# Altium PCB PCB.PcbDoc
Units mil, origin at the board's own origin, x right, y up, seen from the top; angles counter-clockwise.
Board outline 1775 x 2175 mil, 2 copper layers (Top Layer, Bottom Layer); 68 components, 36 nets, 258 pads, 73 vias.
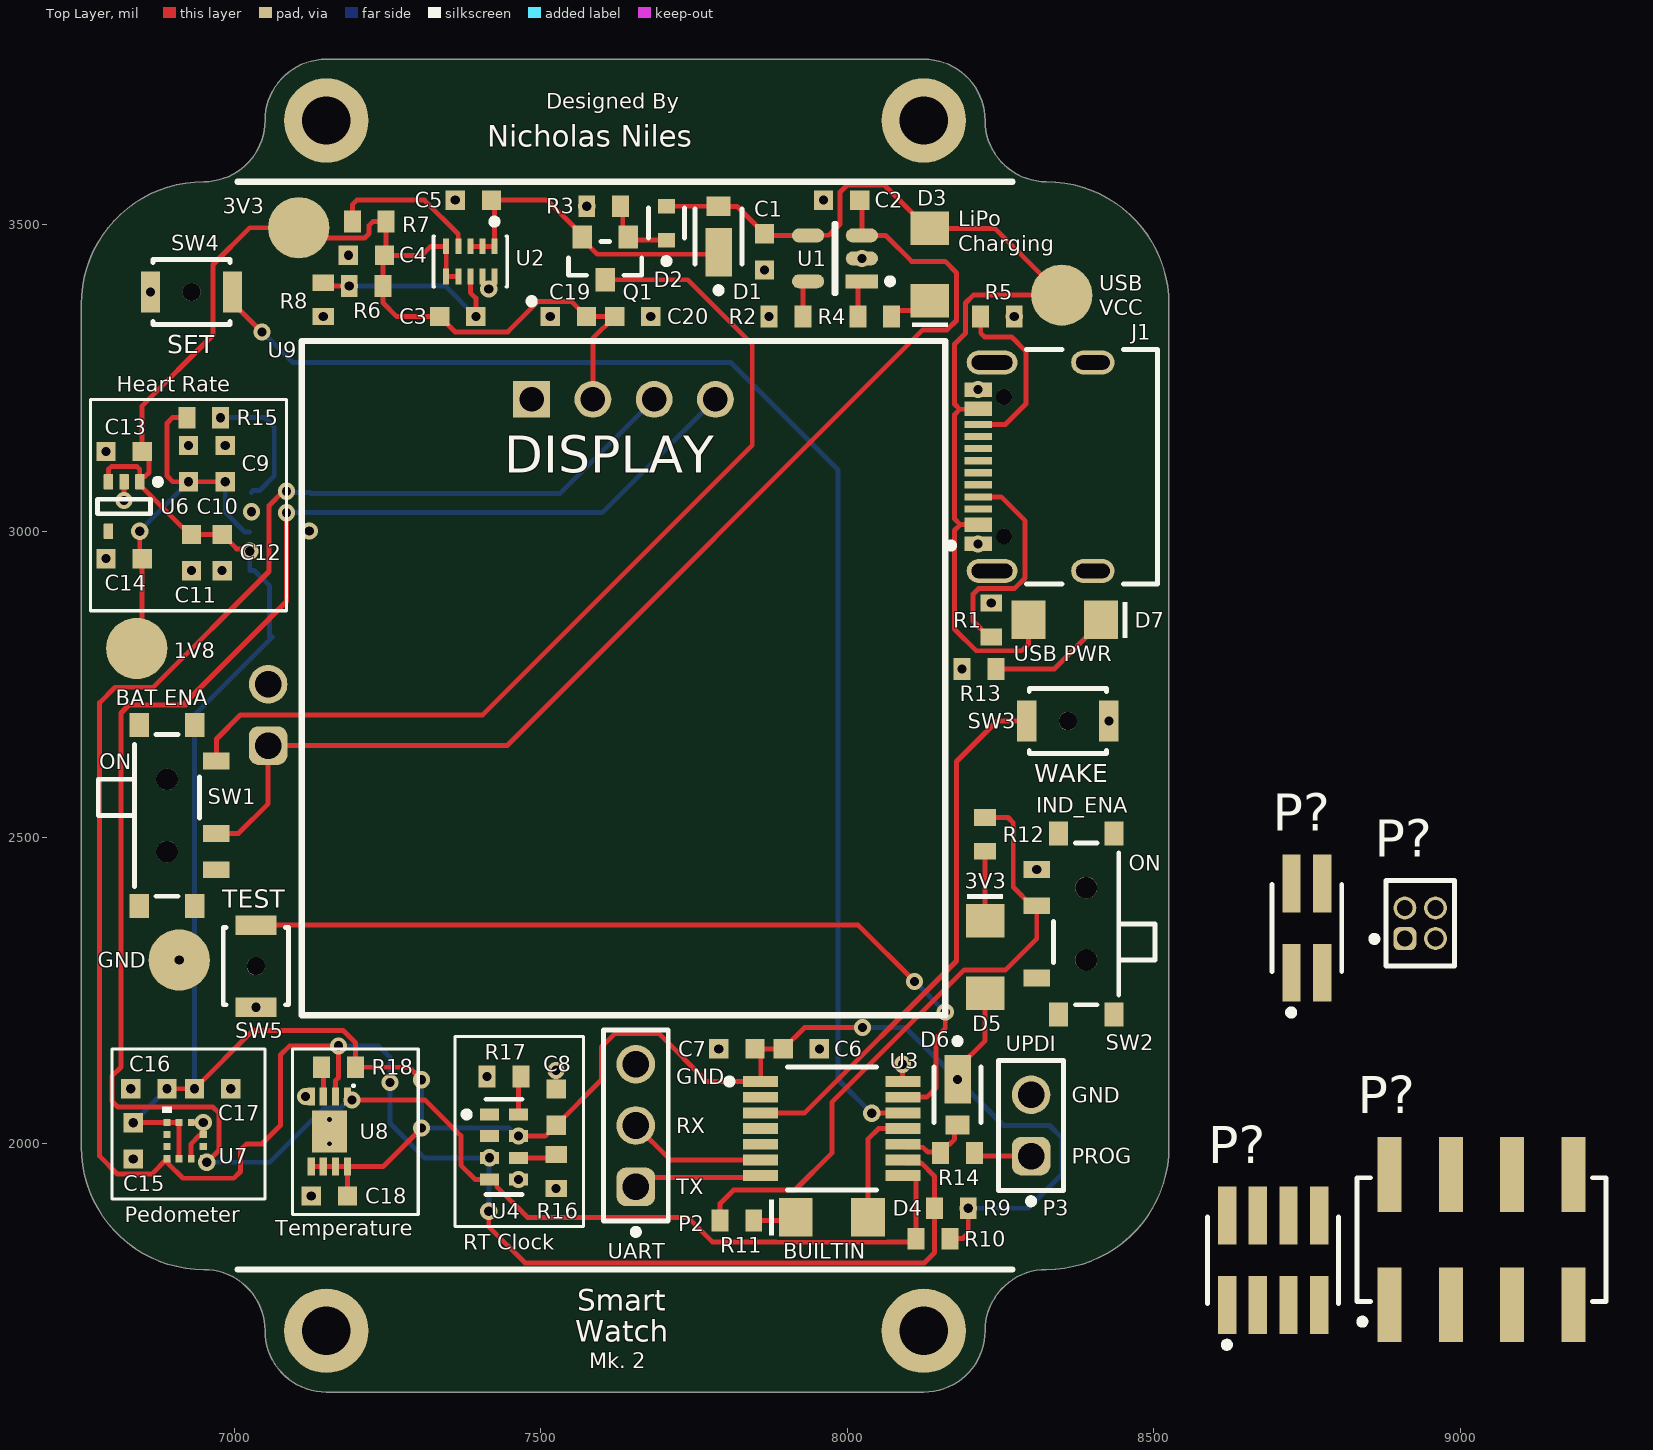
[diagram p0: Top Layer view]
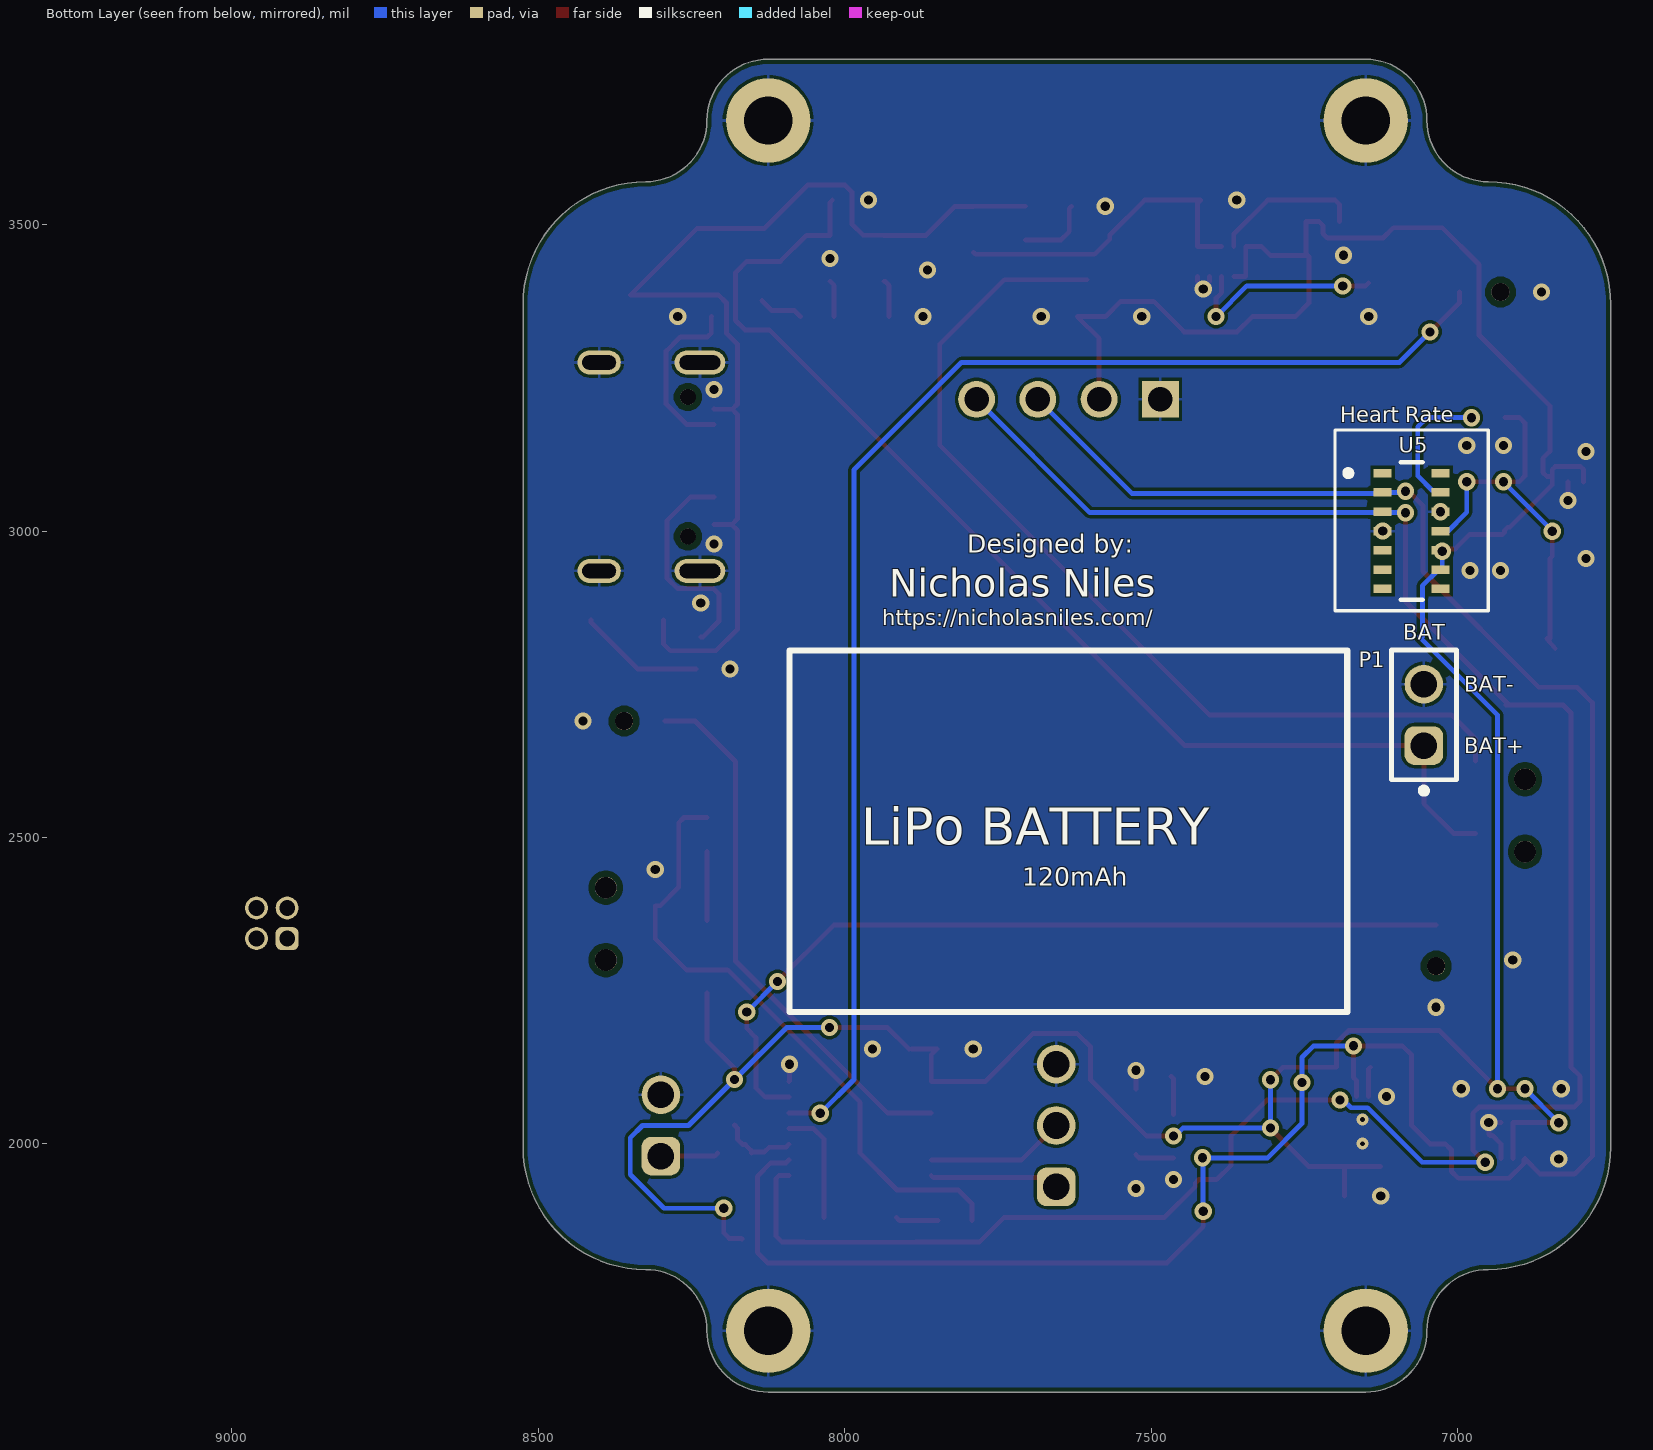
[diagram p1: Bottom Layer view, seen from below]
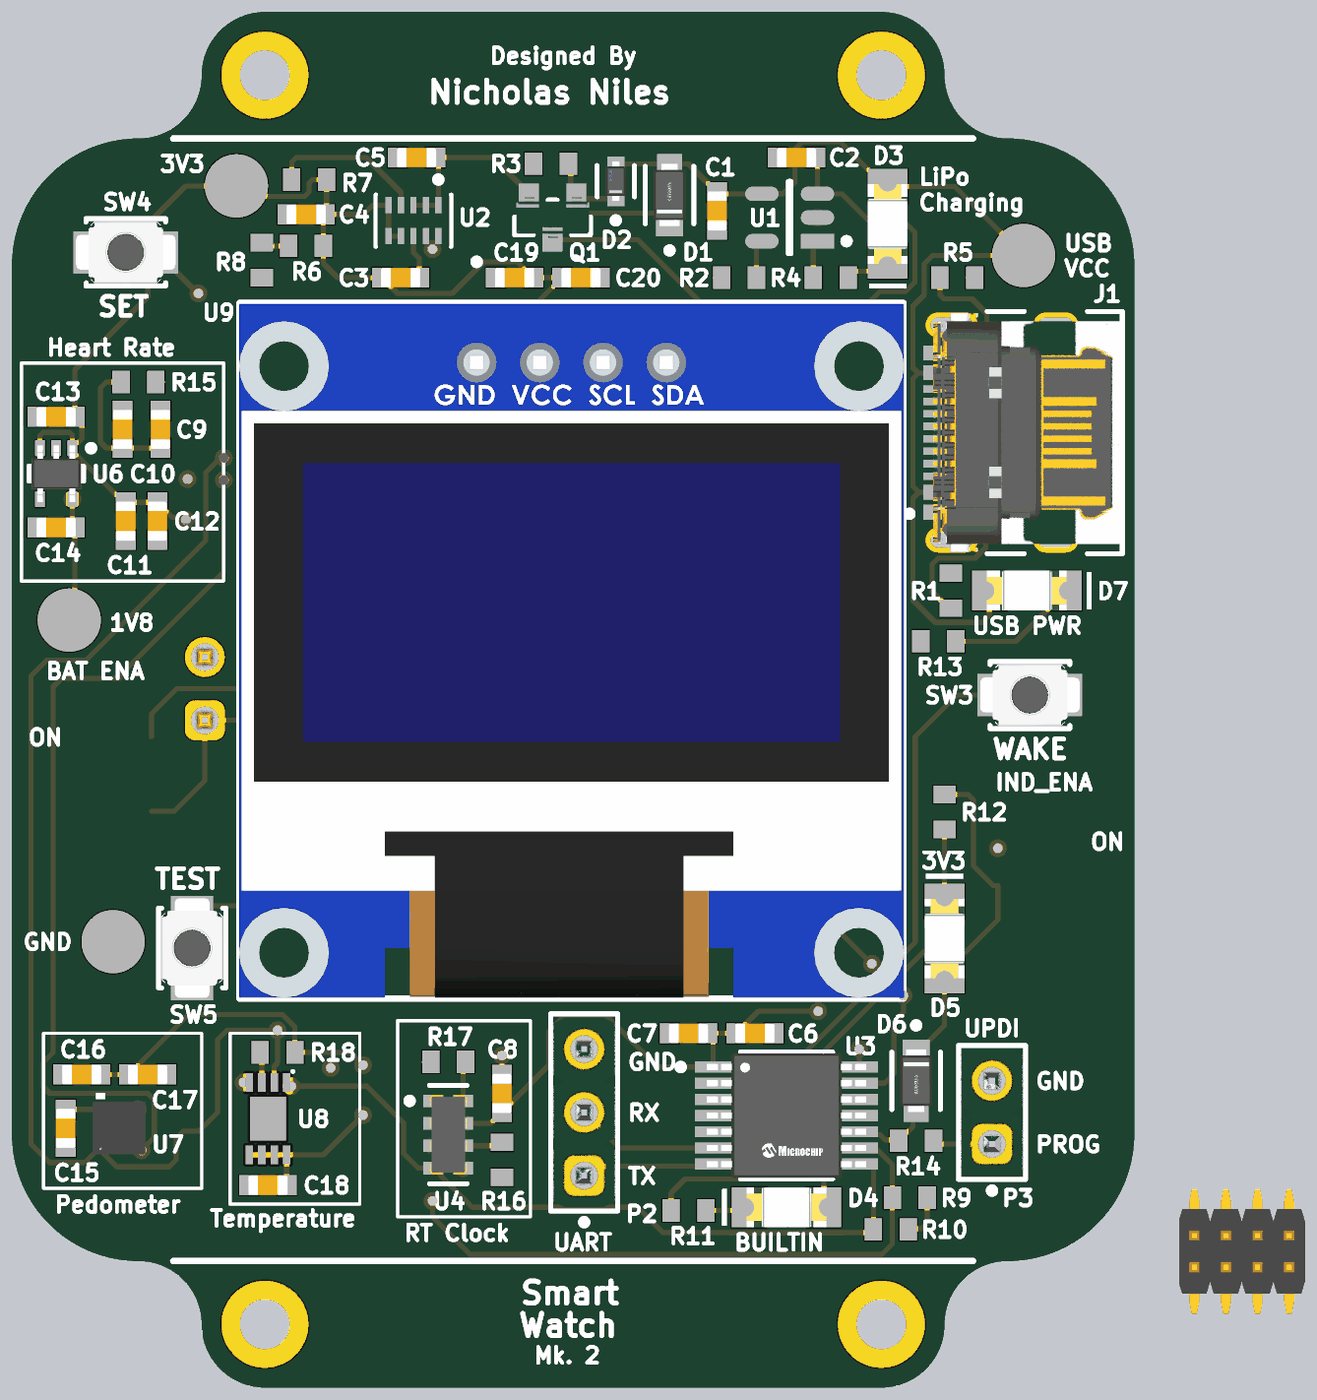
[diagram p2: 3D render of the assembled board from above, using the file's embedded part models]

## Layer stack, top to bottom
Top Solder: solder mask 0.4, Solder Resist, Dk 3.5
Top Layer: signal copper 1.4
Dielectric 1: dielectric 12.6, FR-4, Dk 4.8
Bottom Layer: signal copper 1.4
Bottom Solder: solder mask 0.4, Solder Resist, Dk 3.5

## Board outline
6750,1995 ccw(c6950,1995) 6950,1795 cw(c6950,1695) 7050,1695 ccw(c7150,1695) 7150,1595 8125,1595 ccw(c8125,1695) 8225,1695 cw(c8325,1695) 8325,1795 ccw(c8325,1995) 8525,1995 8525,3370 ccw(c8325,3370) 8325,3570 cw(c8325,3670) 8225,3670 ccw(c8125,3670) 8125,3770 7150,3770 ccw(c7150,3670) 7050,3670 cw(c6950,3670) 6950,3570 ccw(c6950,3370) 6750,3370

## Design rules (kind name [scope] priority, off if disabled: settings)
BoardOutlineClearance [All] p1: gap=7.87 ignorepadtopadclearanceinfootprint=FALSE
Clearance [All] p1: gap=5 ignorepadtopadclearanceinfootprint=TRUE except(10: Arc-Hole Track-Hole SMDPad-Hole THPad-Hole Via-Hole Fill-Hole Poly-Hole Region-Hole Text-Hole)
ComponentClearance [All] p1: gap=5 collisioncheckmode=3 verticalgap=5 showdistances=TRUE
DiffPairsRouting [All] p1: maxlimit=10 minlimit=5 mostfreqgap=5 toplayer_minwidth=5 toplayer_maxwidth=1000 toplayer_prefwidth=5 bottomlayer_minwidth=5 bottomlayer_maxwidth=1000 bottomlayer_prefwidth=5 maxuncoupledlength=500
Height [All] p1: minheight=0 maxheight=71497.94 prefheight=500
HoleSize [All] p1: absolutevalues=TRUE maxlimit=248.03 minlimit=11.81 maxpercent=80.000 minpercent=20.000
HoleToHoleClearance [All] p1: gap=10 allowstackedmicrovias=FALSE
MinimumAnnularRing [All] p1: minimumring=6
MinimumSolderMaskSliver [All] p1: minsoldermaskwidth=6
PlaneClearance [All] p1: clearance=5
PlaneConnect PlaneConnectPowerPads [InPadClass('PowerPads')] p1: planeconnectstyle=Direct reliefexpansion=20 reliefentries=4 reliefconductorwidth=10 reliefairgap=10
PlaneConnect [All] p2: pad.planeconnectstyle=Relief pad.reliefexpansion=11.81 pad.reliefentries=4 pad.reliefconductorwidth=5 pad.reliefairgap=5 via.planeconnectstyle=Direct via.reliefexpansion=11.81 via.reliefentries=4 via.reliefconductorwidth=5 via.reliefairgap=5
PolygonConnect PolygonConnectPowerPads [All vs (InPadClass('PowerPads'))] p1: connectstyle=Direct reliefconductorwidth=10 reliefentries=4 polygonreliefangle="90 Angle" airgapwidth=10
PolygonConnect [All] p2: thpad.connectstyle=Relief thpad.reliefconductorwidth=5 thpad.reliefentries=4 thpad.polygonreliefangle="90 Angle" thpad.airgapwidth=5 smdpad.connectstyle=Relief smdpad.reliefconductorwidth=5 smdpad.reliefentries=4 smdpad.polygonreliefangle="90 Angle" smdpad.airgapwidth=5 via.connectstyle=Direct via.reliefconductorwidth=5 via.reliefentries=4 via.polygonreliefangle="90 Angle" via.airgapwidth=5
RoutingVias [All] p1: holewidth=11.81 width=23.62 viastyle="Through Hole" minholewidth=11.81 minwidth=23.62 maxholewidth=23.62 maxwidth=259.84
SilkToSilkClearance [All] p1: silktosilkclearance=5
SilkToSolderMaskClearance [IsPad] p1: minsilkscreentomaskgap=5 clearancetoexposedcopper=TRUE
SolderMaskExpansion [All] p1: expansion=2 istentingtop=FALSE
SupplyNets "Schematic Supply Nets_6" [InNet('VBAT')] p1: voltage=0.000
SupplyNets "Schematic Supply Nets_5" [InNet('1V8')] p2: voltage=0.000
SupplyNets "Schematic Supply Nets_4" [InNet('GND')] p3: voltage=0.000
SupplyNets "Schematic Supply Nets_3" [InNet('3V3')] p4: voltage=0.000
SupplyNets "Schematic Supply Nets_1" [InNet('BUCK_IN')] p5: voltage=0.000
SupplyNets "Schematic Supply Nets" [InNet('USB_VCC')] p6: voltage=0.000
UnRoutedNet [All] p1: checkbadconnections=TRUE
Width Width_10mil [All] p1: maxlimit=12 minlimit=8 preferedwidth=8 minimp=50.000000 maximp=50.000000 favimp=50.000000
Width Width_6mil [All] p2: maxlimit=1000 minlimit=6 preferedwidth=6 minimp=50.000000 maximp=50.000000 favimp=50.000000
Width Power_20mil [All] p3: maxlimit=1000 minlimit=20 preferedwidth=20 minimp=50.000000 maximp=50.000000 favimp=50.000000
Width Power_12mil [All] p4: maxlimit=1000 minlimit=12 preferedwidth=12 minimp=50.000000 maximp=50.000000 favimp=50.000000
Width Width_5mil [All] p5: maxlimit=1000 minlimit=5 preferedwidth=5 minimp=50.000000 maximp=50.000000 favimp=50.000000
19 further rules are at their usual default settings.

## Classes and differential pairs
component class ICs: C8 C9 C10 C11 C12 C13 C14 C15 C16 C17 C18 R15 R16 R17 R18 U4 U5 U6 U7 U8
component class Microcontroller: C6 C7 D4 D5 D6 D7 P2 P3 P? R9 R10 R11 R12 R13 R14 SW2 SW3 SW4 SW5 U3
component class "LiPo BMS": B1 C1 C2 C3 C4 C5 D1 D2 D3 J1 P1 Q1 R1 R2 R3 R4 R5 R6 R7 R8 SW1 U1 U2
component class Display: C19 C20 U9

## Components (designator, comment, footprint, x,y, rotation, side; value= is the part's Value field where it differs from the comment)
C1 "4.7µF" WCAP-CSGP_0603_L1.6W0.8H0.8_Reflow 7865,3455.47 r90 top
C2 "4.7µF" WCAP-CSGP_0603_L1.6W0.8H0.8_Reflow 7990.94,3540 r0 top
C3 "120pF" WCAP-CSGP_0603_L1.6W0.8H0.8_Reflow 7364.53,3350 r180 top
C4 "10µF" WCAP-CSGP_0603_L1.6W0.8H0.8_Reflow 7215.47,3450 r0 top
C5 "10µF" WCAP-CSGP_0603_L1.6W0.8H0.8_Reflow 7390,3540 r0 top
C6 "0.1µF" WCAP-CSGP_0603_L1.6W0.8H0.8_Reflow 7925,2155 r180 top
C7 "10nF" WCAP-CSGP_0603_L1.6W0.8H0.8_Reflow 7820,2155 r0 top
C8 "0.1µF" WCAP-CSGP_0603_L1.6W0.8H0.8_Reflow 7525,2060 r90 top
C9 "4.7µF" WCAP-CSGP_0603_L1.6W0.8H0.8_Reflow 6985,3110 r90 top
C10 "0.1µF" WCAP-CSGP_0603_L1.6W0.8H0.8_Reflow 6925,3110 r90 top
C11 "0.1µF" WCAP-CSGP_0603_L1.6W0.8H0.8_Reflow 6930,2965 r270 top
C12 "10µF" WCAP-CSGP_0603_L1.6W0.8H0.8_Reflow 6980,2965 r270 top
C13 "1µF" WCAP-CSGP_0603_L1.6W0.8H0.8_Reflow 6820,3130 r0 top
C14 "1µF" WCAP-CSGP_0603_L1.6W0.8H0.8_Reflow 6820,2955 r0 top
C15 "100nF" WCAP-CSGP_0603_L1.6W0.8H0.8_Reflow 6835,2005 r270 top
C16 "100nF" WCAP-CSGP_0603_L1.6W0.8H0.8_Reflow 6860.47,2090 r180 top
C17 "10µF" WCAP-CSGP_0603_L1.6W0.8H0.8_Reflow 6964.53,2090 r0 top
C18 "1µF" WCAP-CSGP_0603_L1.6W0.8H0.8_Reflow 7155,1915 r180 top
C19 "1µF" WCAP-CSGP_0603_L1.6W0.8H0.8_Reflow 7545,3350 r0 top
C20 "0.1µF" WCAP-CSGP_0603_L1.6W0.8H0.8_Reflow 7650,3350 r180 top
D1 "NRVBSS14HE" FP-477AD-MFG 7790,3480.59 r90 top
D2 "1N4148WT-7" FP-SOD523-MFG 7705,3502.44 r90 top
D3 "150120RS75000" WL-SMCW_1206_150120xx75000 8135,3435 r90 top
D4 "150120YS75000" WL-SMCW_1206_150120xx75000 7975,1880 r0 top
D5 "150120GS75000" WL-SMCW_1206_150120xx75000 8225,2305 r270 top
D6 "NRVBSS14HE" FP-477AD-MFG 8180,2080 r270 top
D7 "150120GS75000" WL-SMCW_1206_150120xx75000 8355,2855 r180 top
J1 "USB4105-GF-A" FP-USB4105-GF-A-MFG 8355,3105 r90 top
P1 "61300211121" 61300211121 7055,2700 r90 bottom
P2 "61300311121" 61300311121 7655,2030 r90 top
P3 "61300211121" 61300211121 8300,2030 r90 top
P? "62100421021" 62100421021 8750,2352.17 r0 top
P? "62200421121" 62200421121 8935,2360 r0 top
P? "61000821121" 61000821121 9035,1843.7 r0 top
P? "62100821021" 62100821021 8695,1810 r0 top
Q1 "IRLML6402TRPBF" FP-Micro3-MFG 7605,3445 r270 top
R1 "5.1kΩ" RESC1608X55X25NL10T15 8235,2855 r270 top
R2 "10kΩ" RESC1608X55X25NL10T15 7900,3350 r180 top
R3 "10kΩ" RESC1608X55X25NL10T15 7602.44,3530 r180 top
R4 "1kΩ" RESC1608X55X25NL10T15 8045,3350 r180 top
R5 "5.1kΩ" RESC1608X55X25NL10T15 8245,3350 r180 top
R6 "453kΩ" RESC1608X55X25NL10T15 7215,3400 r180 top
R7 "100kΩ" RESC1608X55X25NL10T15 7220,3505 r0 top
R8 "100kΩ" RESC1608X55X25NL10T15 7145,3377.56 r270 top
R9 "1kΩ" RESC1608X55X25NL10T15 8170,1895 r0 top
R10 "1kΩ" RESC1608X55X25NL10T15 8140,1845 r0 top
R11 "1kΩ" RESC1608X55X25NL10T15 7820,1875 r0 top
R12 "1kΩ" RESC1608X55X25NL10T15 8225,2505 r270 top
R13 "1kΩ" RESC1608X55X25NL10T15 8215,2775 r0 top
R14 "1kΩ" RESC1608X55X25NL10T15 8180,1985 r180 top
R15 "1kΩ" RESC1608X55X25NL10T15 6950,3185 r180 top
R16 "10kΩ" RESC1608X55X25NL10T15 7525,1955 r90 top
R17 "10kΩ" RESC1608X55X25NL10T15 7440,2110 r0 top
R18 "1kΩ" RESC1608X55X25NL10T15 7170,2125 r0 top
SW1 "450404015514" 450404015514 -43110,52535.94 r90 top
SW2 "450404015514" 450404015514 58390,-47640.94 r270 top
SW3 "RST" FP-B3U-1000P-B-MFG 8360,2690 r180 top
SW4 "RST" FP-B3U-1000P-B-MFG 6930,3390 r0 top
SW5 "RST" FP-B3U-1000P-B-MFG 7035,2290 r90 top
U1 "MCP73831T-2ACI/OT" FP-C04-091-OT-IPC_B 7980,3445 r180 top
U2 "TPSM82823SILR" SIL0010D-MFG 7385,3440 r270 top
U3 "ATTINY3224-XU" FP-C04-087-ST-MFG 7975,2025 r0 top
U4 "RV-3028-C7 32.768kHz 1ppm TA QC" FP-RV-3028-C7_32_768kHz_1-MFG 7440,1995 r270 top
U5 "MAX30101EFD+" FP-F143A5-1-MFG 7075,3000 r180 bottom
U6 "TLV70018DCKR" DCK0005A_L 6820,3040 r270 top
U7 "LIS2DUXS12TR" QFN_DUXS12_STM 6919.53,2005.5 r90 top
U8 "MCP9808T-E/MC" MCHP-DFN-MC8_V 7155,2020 r270 top
U9 "128x64 OLED" "Amazon OLED Display Module" 7635,2760 r0 top locked

## Footprints (in the part's own frame and the unit in brackets; to place one, negate y for a bottom-side part, rotate by r counter-clockwise, add the part's x,y. Pads: shape width x height; smd on the part's side, far side on the other; paste and mask are expansions set on the pad)
61000821121 [mm] "Pin Header, pitch 2.54 mm, SMD, Vertical, dual row, 8p"
  rect 1x3.1 smd: 1(-3.81,-2.7) 2(-3.81,2.7) 3(-1.27,-2.7) 4(-1.27,2.7) 5(1.27,-2.7) 6(1.27,2.7) 7(3.81,-2.7) 8(3.81,2.7)
  silkscreen extent -5.16,-3.52 5.16,2.57, body extent -5.08,-3.75 5.08,3.75, height 9.62
61300211121 [mm] "Pin Header, pitch 2.54 mm, THT, Vertical, single row, 2p"
  rrect50% 1.6x1.6 hole 1.1: 1(-1.27,0)
  round 1.6 hole 1.1: 2(1.27,0)
  silkscreen extent -3.26,-1.35 2.69,1.35, body extent -2.54,-1.27 2.54,1.27, height 8.57
61300311121 [mm] "Pin Header, pitch 2.54 mm, THT, Vertical, single row, 3p"
  rrect50% 1.6x1.6 hole 1.1: 1(-2.54,0)
  round 1.6 hole 1.1: 2(0,0) 3(2.54,0)
  silkscreen extent -4.53,-1.35 3.96,1.35, body extent -3.81,-1.27 3.81,1.27, height 8.57
62100421021 [mm] "Pin Header, pitch 1.27 mm, SMD, Vertical, dual row, 4p"
  rect 0.76x2.4 smd: 1(-0.635,-1.85) 2(-0.635,1.85) 3(0.635,-1.85) 4(0.635,1.85)
  silkscreen extent -1.45,-3.62 1.45,1.8, body extent -1.27,-2.55 1.27,2.55, height 5.9
62100821021 [mm] "Pin Header, pitch 1.27 mm, SMD, Vertical, dual row, 8p"
  rect 0.76x2.4 smd: 1(-1.905,-1.85) 2(-1.905,1.85) 3(-0.635,-1.85) 4(-0.635,1.85) 5(0.635,-1.85) 6(0.635,1.85) 7(1.905,-1.85) 8(1.905,1.85)
  silkscreen extent -2.72,-3.62 2.72,1.8, body extent -2.54,-2.5 2.54,2.5, height 5.9
62200421121 [mm] "Pin Header, pitch 1.27 mm, THT, Vertical, dual row, 4p"
  rrect50% 0.95x0.95 hole 0.65: 1(-0.635,-0.635)
  round 0.95 hole 0.65: 2(-0.635,0.635) 3(0.635,-0.635) 4(0.635,0.635)
  silkscreen extent -2.02,-1.78 1.42,1.78, body extent -1.27,-1.7 1.27,1.7, height 5.33
450404015514 [mm] "Right angle Slide Switch"
  rect 0.7x1.1 smd: COM(-1270.75,-1272.05) L1(-1267.75,-1272.05) L2(-1272.25,-1272.05)
  round 0.9 hole 0.9 unplated: M1(-1271.5,-1270) M2(-1268.5,-1270)
  rect 1x0.8 smd: M3(-1273.75,-1268.85) M4(-1266.25,-1268.85) M5(-1273.75,-1271.15) M6(-1266.25,-1271.15)
  silkscreen extent -1273.35,-1271.35 -1266.65,-1267.15, body extent -1273.85,-1272.25 -1266.15,-1267.12, height 1.4
"Amazon OLED Display Module" [mil] "Hosyond 0.96 Inch OLED I2C Display Module 128x64 Pixel OLED Display"
  rect 60x60 hole 40: 1(-150,455)
  round 60 hole 40: 2(-50,455) 3(50,455) 4(150,455)
  silkscreen extent -525,-550 525,620, body extent -526,-548 526,548, height 198
DCK0005A_L [mm] "SOT23, 5-Leads, Body 2.15x1.4mm, Pitch 0.65mm, IPC High Density"
  rrect25% 0.65x0.4 smd: 1(-1.025,0.65) 2(-1.025,0) 3(-1.025,-0.65) 4(1.025,-0.65) 5(1.025,0.65)
  silkscreen extent -1.15,-1.1 0.3,1.53, body extent -1.14,-1 1.14,1, height 0.94
FP-477AD-MFG [mm]
  rect 2x1.1 smd paste+0 mask+0: 1(-0.65,0)
  rect 0.8x1 smd paste+0 mask+0: 2(1.25,0)
  silkscreen extent -2.35,-0.97 1.15,0.97, body extent -1.75,-0.8 1.75,0.8, height 0.25
FP-B3U-1000P-B-MFG [mm]
  rect 0.8x1.7 smd paste+0 mask+0: 1(-1.7,0) 2(1.7,0)
  round 0.75 hole 0.75 unplated paste-2539.97 mask+0: ""(0,0)
  silkscreen extent -1.6,-1.35 1.6,1.35, body extent -2.2,-1.45 2.2,1.45, height 0.25
FP-C04-087-ST-MFG [mm]
  rect 1.45x0.45 smd paste+0 mask+0: 1(-2.95,1.95) 2(-2.95,1.3) 3(-2.95,0.65) 4(-2.95,0) 5(-2.95,-0.65) 6(-2.95,-1.3) 7(-2.95,-1.95) 8(2.95,-1.95) 9(2.95,-1.3) 10(2.95,-0.65) 11(2.95,0) 12(2.95,0.65) 13(2.95,1.3) 14(2.95,1.95)
  silkscreen extent -4.37,-2.55 1.85,2.55, body extent -3.2,-2.5 3.2,2.5, height 1.2
FP-C04-091-OT-IPC_B [mm]
  rect 1.338x0.578 smd paste+0 mask+0: 1(-1.116,0.95)
  rrect100% 1.338x0.578 smd paste+0 mask+0: 2(-1.116,0) 3(-1.116,-0.95) 4(1.116,-0.95) 5(1.116,0.95)
  silkscreen extent -2.41,-1.45 0.05,1.45
FP-F143A5-1-MFG [mm]
  rect 0.75x0.35 smd paste+0 mask+0: 1(-1.2,2.4) 2(-1.2,1.6) 3(-1.2,0.8) 4(-1.2,0) 5(-1.2,-0.8) 6(-1.2,-1.6) 7(-1.2,-2.4) 8(1.2,-2.4) 9(1.2,-1.6) 10(1.2,-0.8) 11(1.2,0) 12(1.2,0.8) 13(1.2,1.6) 14(1.2,2.4)
  silkscreen extent -2.75,-2.85 0.45,2.85, body extent -1.65,-2.8 1.65,2.8, height 1.65
FP-Micro3-MFG [mm]
  rect 0.972x0.802 smd paste+0 mask+0: 1(-0.885,0.95) 2(-0.885,-0.95) 3(0.885,0)
  silkscreen extent -0.7,-1.52 0.7,1.52, body extent -1.47,-1.87 1.47,1.87, height 0.25
FP-RV-3028-C7_32_768kHz_1-MFG [mm]
  rect 0.5x0.8 smd paste+0 mask+0: 1(-1.35,-0.6) 2(-0.45,-0.6) 3(0.45,-0.6) 4(1.35,-0.6) 5(1.35,0.6) 6(0.45,0.6) 7(-0.45,0.6) 8(-1.35,0.6)
  silkscreen extent -1.97,-1.67 1.97,0.75, body extent -1.6,-0.75 1.6,0.75, height 0.8
FP-SOD523-MFG [mm]
  rect 0.6x0.7 smd paste+0 mask+0: 1(-0.7,0) 2(0.7,0)
  silkscreen extent -1.7,-0.75 0.63,0.75, body extent -1.1,-0.53 1.1,0.53, height 0.25
FP-USB4105-GF-A-MFG [mm]
  rrect100% 1x2.1 hole 1.7 slot 0.6 at 0 deg paste-2539.97 mask+0: 1(-4.32,3.015) 2(4.32,3.015)
  rrect100% 1x1.8 hole 1.4 slot 0.6 at 0 deg paste-2539.97 mask+0: 3(-4.32,-1.165) 4(4.32,-1.165)
  rect 0.6x1.15 smd paste+0 mask+0: A1-B12(-3.2,3.59) A4-B9(-2.4,3.59) B1-A12(3.2,3.59) B4-A9(2.4,3.59)
  rect 0.3x1.15 smd paste+0 mask+0: A5(-1.25,3.59) A6(-0.25,3.59) A7(0.25,3.59) A8(1.25,3.59) B5(1.75,3.59) B6(0.75,3.59) B7(-0.75,3.59) B8(-1.75,3.59)
  round 0.65 hole 0.65 unplated paste-2539.97 mask+0: ""(-2.89,2.515) ""(2.89,2.515)
  silkscreen extent -4.86,-3.84 4.86,4.84, body extent -4.79,-3.76 4.79,3.77, height 3.26
MCHP-DFN-MC8_V [mm] "SON, 8-Leads, Body 3x2mm, Pitch 0.5mm, Thermal Pad 1.45x1.75mm"
  rect 0.75x0.3 smd mask+0.102: 1(-1.45,0.75) 2(-1.45,0.25) 3(-1.45,-0.25) 4(-1.45,-0.75) 5(1.45,-0.75) 6(1.45,-0.25) 7(1.45,0.25) 8(1.45,0.75)
  rect 1.75x1.45 smd mask+0.102: 9(0,0)
  silkscreen extent -1.95,0.95 -1.85,1.05, body extent -1.5,-1 1.5,1, height 1
QFN_DUXS12_STM [mil]
  rect 12x11 smd paste+0 mask+0: 1(-29.5,29.53) 2(-29.5,9.85) 3(-29.5,-9.85) 4(-29.5,-29.53) 7(29.5,-29.53) 8(29.5,-9.85) 9(29.5,9.85) 10(29.5,29.53)
  rect 11x12 smd paste+0 mask+0: 5(-9.85,-29.5) 6(9.85,-29.5) 11(9.85,29.5) 12(-9.85,29.5)
  silkscreen extent 46,22 56,37, body extent -41,-41 41,41, height 29
RESC1608X55X25NL10T15 [mm] "Chip Resistor, 2-Leads, Body 1.60x0.80mm, IPC Medium Density"
  rect 0.7x0.9 smd: 1(-0.7,0) 2(0.7,0)
  body extent -0.85,-0.45 0.85,0.45, height 0.55
SIL0010D-MFG [mm]
  rect 0.65x0.25 smd paste+0 mask+0: 1(-0.625,1) 2(-0.625,0.5) 3(-0.625,0) 4(-0.625,-0.5) 5(-0.625,-1) 6(0.625,-1) 7(0.625,-0.5) 8(0.625,0) 9(0.625,0.5) 10(0.625,1)
  silkscreen extent -1.77,-1.53 1.05,1.53
WCAP-CSGP_0603_L1.6W0.8H0.8_Reflow [mm] "Ceramic Capacitors, body 1.6x0.8mm"
  rect 0.8x0.8 smd: 1(-0.75,0) 2(0.75,0)
  body extent -0.8,-0.4 0.8,0.4, height 0.8
WL-SMCW_1206_150120xx75000 [mm] "SMD Mono-color Chip LED, body 3.2x1.6mm"
  rect 1.4x1.6 smd: 1(-1.5,0) 2(1.5,0)
  silkscreen extent -2.6,-0.75 -2.4,0.75, body extent -1.6,-0.8 1.6,0.8, height 0.68

## Part data
C1 C2 C3 C5: library part CMP-207839-000060-3
C4 C6 C7 C8 C9 C10 C11 C12 C13 C14 C15 C16 C17 C18 C19 C20: library part CMP-207839-000060-3, "10V tolerance"
D1 D6: library part CMP-00278-93203856-2, "NRVBSS14HE Rectifier Diode, Schottky, 1 Phase, 1 Element, 1A, 40V V(RRM), Silicon", Capacitance=55pF, Forward Current=1A, Manufacturer Lifecycle Status=ACTIVE, Max Forward Surge Current (Ifsm)=25A, Max Junction Temperature (Tj)=150°C, Max Repetitive Reverse Voltage (Vrrm)=40V, Min Operating Temperature=-55°C, Peak Reverse Current=5µA, Height=750µm, Lifecycle Status=Production, Max Operating Temperature=150°C, NexarPartId=93203856, Reverse Voltage=40V, RoHS=Compliant
D2: library part CMP-2000-05518-3, "DIODE GEN PURP 80V 125MA SOD523", Average Rectified Current=125mA, Capacitance=2pF, Forward Current=250mA, Forward Voltage=1.25V, Max Forward Surge Current (Ifsm)=2A, Max Operating Temperature=150°C, Max Repetitive Reverse Voltage (Vrrm)=100V, Max Reverse Voltage (DC)=80V, Min Operating Temperature=-65°C, Package Quantity=3000, Peak Reverse Current=1uA, Power Dissipation=150mW, Contact Plating=Tin, Current Rating=125mA, Element Configuration=Single, Height=0.65mm, Lead Free="Lead Free", Length=0.9mm, Max Surge Current=2A, Mount="Surface Mount", Number of Pins=2, Output Current=125mA, Packaging="Tape and Reel", Peak Non-Repetitive Surge Current=2A, Polarity=Standard, Power Rating=150mW, Radiation Hardening=No, REACH SVHC="No SVHC", Recovery Time=4ns, Reverse Recovery Time=4ns, Voltage Rating (DC)=80V, Weight=3.5E-05oz, Width=1.3mm
D3: library part CMP-1426-00013-4, "WL-SMCW SMT Mono-Color Chip LED Waterclear", Case Code (Imperial)=1206, Case Code (Metric)=3216, Color=Red, Forward Current=100mA, Forward Voltage=2V, Max Junction Temperature (Tj)=95°C, Max Operating Temperature=85°C, Max Reverse Voltage (DC)=5V, Min Operating Temperature=-40°C, Power Dissipation=72mW, Test Current=20mA, Case/Package=1206, Dominant Wavelength=625nm, Height=680µm, Length=3.2mm, Lens Style="Clear, Rectangular", Luminous Intensity=150mcd, Mount="Surface Mount", Packaging="Tape and Reel", Peak Wavelength=630nm, REACH SVHC=Unknown, Reverse Voltage=5V, RoHS=Compliant, Viewing Angle=140°, Wavelength=625nm, Width=1.6mm
D4: library part CMP-1426-00019-3, "Led, Yellow, 590 Nm, 2 V, 30 Ma, 120 Mcd Rohs Compliant: Yes", Case Code (Imperial)=1206, Case Code (Metric)=3216, Color=Yellow, Forward Current=100mA, Forward Voltage=2V, Max Operating Temperature=85°C, Max Reverse Voltage (DC)=5V, Min Operating Temperature=-40°C, Test Current=20mA, Case/Package=1206, Dominant Wavelength=590nm, Height=680µm, Length=3.2mm, Lens Style="Clear, Rectangular", Luminous Intensity=120mcd, Mount="Surface Mount", Packaging="Tape and Reel", Peak Wavelength=595nm, REACH SVHC=Unknown, RoHS=Compliant, Viewing Angle=140°, Wavelength=590nm, Width=1.6mm
D5 D7: library part CMP-1426-00014-4, "WL-SMCW SMT Mono-Color Chip LED Waterclear", Case Code (Imperial)=1206, Case Code (Metric)=3216, Color=Green, Forward Current=100mA, Forward Voltage=3.2V, Max Junction Temperature (Tj)=95°C, Max Operating Temperature=85°C, Max Reverse Voltage (DC)=5V, Min Operating Temperature=-40°C, Power Dissipation=105mW, Test Current=20mA, Case/Package=1206, Dominant Wavelength=525nm, Height=680µm, Length=3.2mm, Lens Style="Clear, Rectangular", Luminous Intensity=450mcd, Mount="Surface Mount", Packaging="Tape and Reel", Peak Wavelength=515nm, REACH SVHC=Unknown, Reverse Voltage=5V, RoHS=Compliant, Viewing Angle=140°, Wavelength=525nm, Width=1.6mm
J1: library part CMP-245163-000001-1, "CONN RCPT USB2.0 TYPEC 5A", Current Rating=5/6.25/1.25/0.25A, Manufacturer=GCT, Package=0, Temperature="-40°C to +85°C", Temperature Range High=+85°C, Temperature Range Low=-40°C, Voltage Rating=20V, Automotive=No, Category=Conn, ComponentLink2Description=Datasheet, ComponentLink2URL=https://gct.co/files/drawings/usb4105.pdf, Conn Orientation="Right Angle", Contact Material=Gold,Nickel, Device Class L1=Connectors, Device Class L2="USB Connectors", Device Class L3=unset, Digikey Description="CONN RCPT USB2.0 TYPEC 5A", Height=3.46mm, Is Female=yes, Lead Free=Yes, Manufacturer Part Number=USB4105-GF-A, Number of Contacts=16, Octopart=https://octopart.com/usb4105-gf-a-gct-106627878, RoHS=TRUE, Usb Standard="USB 2.0"
P1 P3: library part CMP-1712-00002-6, Color=Black, Contact Resistance=20mΩ, Current Rating=3A, Max Operating Temperature=125°C, Min Operating Temperature=-40°C, Operating Supply Voltage=250V, Connector Type="Male Pin", Contact Gender=Male, Contact Material=Copper, Contact Mating Length=5.9944mm, Contact Plating=Gold, Gender=Male, Height=8.94mm, Housing Material=PBT, Lead Free="Lead Free", Lead Pitch=2.54mm, Mount="Through Hole", NexarPartId=20081794, Number of Contacts=2, Number of Pins=2, Number of Positions=2, Number of Rows=1, Orientation=Vertical, Packaging=Bulk, Pitch=2.54mm, REACH SVHC="No SVHC", RoHS=Compliant, Termination="Through Hole", Voltage Rating=250V
P2: library part CMP-1502-01062-3, Color=Black, Contact Resistance=20mΩ, Current Rating=3A, Max Operating Temperature=105°C, Min Operating Temperature=-40°C, Operating Supply Voltage=250V, Connector Type="Male Pin", Contact Material=Copper, Contact Mating Length=5.9944mm, Contact Plating=Gold, Gender=Male, Height=8.94mm, Lead Free="Lead Free", Lead Pitch=2.54mm, Mount="Through Hole", NexarPartId=32855521, Number of Contacts=3, Number of Pins=3, Number of Positions=3, Number of Rows=1, Orientation=Vertical, Packaging=Bulk, Pitch=2.54mm, REACH SVHC=Unknown, RoHS=Compliant, Termination=Solder, Voltage Rating=250V
P?: library part CMP-1502-00925-4, "Conn, Header, 4Pos, 2Row, 1.27Mm Rohs Compliant: Yes", Contact Resistance=20mΩ, Current Rating=1A, Operating Supply Voltage=100V, Gender=Male, Lead Pitch=1.27mm, Number of Pins=4, Orientation=Vertical, RoHS=Non-Compliant
P?: library part CMP-1502-00946-4, "THT Vertical Pin Header WR-PHD, Pitch 1.27 mm, Dual Row, 4 pins", Color=Black, Contact Resistance=20mΩ, Current Rating=1A, Operating Supply Voltage=100V, Connector Type="Male Pin", Contact Material=Copper, Contact Mating Length=3.81mm, Contact Plating=Gold, Gender=Male, Lead Pitch=1.27mm, Mount="Through Hole", Number of Contacts=4, Number of Pins=4, Number of Positions=4, Number of Rows=2, Orientation=Vertical, Packaging=Box, Pitch=1.27mm, RoHS=Compliant, Row Spacing=1.27mm, Termination=Solder
P?: library part CMP-1502-01025-4, "SMT Vertical Pin Header WR-PHD, Pitch 2.54 mm, Dual Row, 8 pins", Color=Black, Contact Resistance=20mΩ, Current Rating=3A, Operating Supply Voltage=250V, Connector Type="Male Pin", Contact Material=Copper, Contact Mating Length=5.9944mm, Contact Plating=Gold, Gender=Male, Lead Pitch=2.54mm, Mount="Surface Mount", Number of Contacts=8, Number of Pins=8, Number of Positions=8, Number of Rows=2, Orientation=Vertical, Pitch=2.54mm, RoHS=Compliant, Row Spacing=2.54mm, Termination=Solder
P?: library part CMP-1502-00926-4, "Conn, Header, 8Pos, 2Row, 1.27Mm Rohs Compliant: Yes", Contact Resistance=20mΩ, Current Rating=1A, Operating Supply Voltage=100V, Gender=Male, Lead Pitch=1.27mm, Number of Pins=8, Orientation=Vertical, RoHS=Non-Compliant
Q1: library part CMP-32901-000130-1, "MOSFET P-CH 20V 3.7A SOT-23", Continuous Drain Current=-3.7A, Drain To Source Breakdown Voltage=-20V, Drain To Source Resistance=0.05Ω, Gate To Source Voltage=12V, Input Capacitace At Vds="633pF @ -10V", Manufacturer=Infineon, Max Forward Diode Voltage=-1.2V, Max Junction Temp=+150°C, Package=Micro3, Power Dissipation=1.3W, Pulse Drain Current=-22A, Temperature="-55°C to +150°C", Temperature Range Low=-55°C, Automotive=No, Category=Trans, ComponentLink2Description=Datasheet, ComponentLink2URL=https://www.infineon.com/dgdl/irlml6402pbf.pdf?fileId=5546d462533600a401535668d5c2263c, Depletion Mode=False, Device Class L1="Discrete Semiconductors", Device Class L2=Transistors, Device Class L3=MOSFETs, Digikey Description="MOSFET P-CH 20V 3.7A SOT-23", Drain To Source Voltage=-20V, Footprint Url=http://irf.com/package/outline/po_micro3.pdf, Gate Charge At Vgs="8nC @ -5V", Height=1.12mm, Ipc Land Pattern Name=SOT95P237X100-3, Lead Free=Yes, Manufacturer Part Number=IRLML6402TRPBF, Number Of Channels=1, Number Of P Channels=1, Octopart=https://octopart.com/irlml6402trpbf-infineon-65874989, Reverse Recovery Charge=11nC, Reverse Recovery Time=29ns, RoHS=TRUE, Rthja Max=75°C/W, Standoff Height=0.01mm, Technology=MOSFET, Temperature Range High=+150°C, Threshold Vgs=-0.55V, Threshold Vgs Max=-1.2V, Threshold Vgs Min=-0.4V, Turn Off Delay Time=588ns, Turn On Delay Time=350ns
R1 R2 R3 R4 R5 R6 R7 R8 R9 R10 R11 R12 R13 R14 R15 R16 R17 R18: library part CMP-2000-04186-1
SW1 SW2: library part CMP-03913-99472344-1, "450404015514 Slide Switch, 0.3A, 5Vdc, Smd Rohs Compliant: Yes", Current Rating=300mA, Insulation Resistance=100MΩ, Max Operating Temperature=85°C, Min Operating Temperature=-40°C, Voltage Rating=5V, Contact Plating=Silver, NexarPartId=99472344, Packaging="Tape and Reel", RoHS=Compliant
SW3 SW4 SW5: library part CMP-08834-000005-1, "SWITCH TACTILE SPST-NO 0.05A 12V", Ambient Temperature Range High=+70°C, Ambient Temperature Range Low=-25°C, Contact Current Rating=50mA, Contact Resistance=100mΩ, Manufacturer=Omron, Manufacturer Part Number=B3U-1000P-B, Operating Force=1.5N, Package=0, Temperature="-25°C to +70°C", Voltage Rating DC=12V, Automotive=No, Category=Switch, ComponentLink2Description=Datasheet, ComponentLink2URL=https://omronfs.omron.com/en_US/ecb/products/pdf/en-b3u.pdf, Device Class L1=Electromechanical, Device Class L2=Switches, Device Class L3="Tactile Switches", Digikey Description="SWITCH TACTILE SPST-NO 0.05A 12V", Electromechanical Life=200000Cycles, Height=1.75mm, Lead Free=Yes, Mount="Surface Mount", Mouser Description="Tactile Switches Top Actuated with boss w/o ground", Octopart=https://octopart.com/b3u-1000p-b-omron-1057356, RoHS=TRUE, Temperature Range High=+70°C, Temperature Range Low=-25°C, Throw Configuration=SPST-NO
U1: library part CMP-0133-00143-2, "IC CONTROLLR LI-ION 4.2V SOT23-5", Case/Package=SOT-23, Drain To Source Resistance=350mR, Max Charge Current=500mA, Max Input Voltage=6V, Max Operating Temperature=85°C, Max Output Voltage=4.5V, Max Power Dissipation=1.54W, Min Operating Temperature=-40°C, Min Output Voltage=4.168V, Min Supply Voltage=3.75V, Output Voltage=4.2V, Voltage Rating=4.534V, Contact Plating=Tin, Height=0.051inch, Lead Free="Lead Free", Length=0.122inch, Max Supply Voltage=6V, Mount="Surface Mount", Number of Cells=1, Number Of Channels=1, Number of Outputs=1, Number of Pins=5, Output Current=500mA, Packaging="Tape and Reel", Radiation Hardening=No, REACH SVHC="No SVHC", Termination=SMD/SMT, Weight=0.00709oz, Width=0.071inch
U2: "No Description Available", Mfr_Name="Texas Instruments", RefDes=RefDes, Type=TYPE
U3: library part CMP-00252-122240563-1, "ATTINY3224-XU Microcontroller 8-Bit AVR RISC 32KB Flash 1.8V to 5.5V 14-Pin TSSOP Tube", NexarPartId=122240563
U4: library part CMP-226158-000001-1, "Real Time Clock Serial 2byte Clock/Calendar/Alarm/Timer/Battery Backup 8-Pin CSMD T/R", Ambient Temperature Range High=+85°C, Ambient Temperature Range Low=-40°C, Frequency=32.768kHz, Manufacturer="Micro Crystal", Max Supply Voltage=5.5V, Min Supply Voltage=1.1V, Nominal Supply Current=0.04uA, Temperature="-40°C to +85°C", Automotive=No, Category=IC, ComponentLink2Description=Datasheet, ComponentLink2URL=https://www.microcrystal.com/fileadmin/Media/Products/RTC/Datasheet/RV-3028-C7.pdf, Device Class L1="Integrated Circuits (ICs)", Device Class L2="Clock and Timing", Device Class L3="Real Time Clocks", Height=0.8mm, Interface=I2C, Lead Free=Yes, Manufacturer Part Number="RV-3028-C7 32.768kHz 1ppm TA QC", Memory Size=2Bytes, Mouser Description="RV-3028-C7 32.768KHZ 1PPM Ta Qc", Number of Outputs=1, Octopart=https://octopart.com/rv-3028-c7+32.768khz+1ppm+ta+qc-micro+crystal-98880451, Package="RV-3028-C7 32.768kHz 1ppm TA QC", RoHS=TRUE, Temperature Range High=+85°C, Temperature Range Low=-40°C
U5: library part CMP-05738-000001-1, "INTEGRATED OPTICAL SENSOR", Manufacturer="Maxim Integrated", Max Junction Temp=+90°C, Max Supply Voltage=2V, Min Supply Voltage=1.7V, Operating Supply Current=600uA, Package=F143A5-1, Temperature="-40°C to +85°C", Temperature Range High=+85°C, Temperature Range Low=-40°C, Automotive=No, Category=IC, ComponentLink2Description=Datasheet, ComponentLink2URL=https://datasheets.maximintegrated.com/en/ds/MAX30101.pdf, Device Class L1=Sensors, Device Class L2=unset, Device Class L3=unset, Digikey Description="INTEGRATED OPTICAL SENSOR", Footprint Url=https://pdfserv.maximintegrated.com/land_patterns/90-0602.PDF, Height=1.65mm, Lead Free=Yes, Manufacturer Part Number=MAX30101EFD+, Mouser Description="INTEGRATED OPTICAL SENSOR", Octopart=https://octopart.com/max30101efd%2B-maxim+integrated-57054333, RoHS=TRUE, Sensor Output=I2C
U6: library part CMP-0394-00928-2, "Single Output LDO, 200 mA, Fixed 1.8 V Output, 2 to 5.5 V Input, with Low IQ, 5-pin SC70 (DCK), -40 to 125 degC, Green (RoHS & no Sb/Br)", Manufacturer="Texas Instruments", Accuracy(%)=2, Code_JEDEC=MO-203, ComponentLink1Description="Manufacturer URL", ComponentLink1URL=http://www.ti.com/, ComponentLink2Description=Datasheet, ComponentLink2URL=http://www.ti.com/general/docs/lit/getliterature.tsp?genericPartNumber=TLV70018&fileType=pdf, ComponentLink3Description="Package Specification", ComponentLink3URL=http://www.ti.com/litv/pdf/mpds025f, DatasheetVersion=SLVSA00D, Eco-Plan="Green (RoHS & no Sb/Br)", Fixed Output Options(V)=1.8, Iout(Max)(A)=0.2, Iq(Typ)(mA)=0.03, Mounting Technology="Surface Mount", PackageDescription="5-Pin Plastic Small-Outline, Body 2 x 1.25 mm, Pitch 0.65 mm", PackageReference=DCK0005A, PackageVersion=4093553-3/G, PartNumber=TLV70018DCKR, SubFamily="Single Channel LDO", Vdo(Typ)(mV)=175, Vin(Max)(V)=5.5, Vin(Min)(V)=2, Vout Adj(Max)(V)=1.8, Vout Adj(Min)(V)=1.8
U7: "Ultralow-power 3-axis smart accelerometer with Qvar, AI, antialiasing filter, and advanced digital features", Manufacturer_Name=STMicroelectronics, Copyright="Copyright (C) 2025 Ultra Librarian. All rights reserved.", Manufacturer_Part_Number=LIS2DUXS12TR, RefDes=RefDes, Type="Motion Sensors"
U8: library part CMP-0192-00342-1, "+ / - 0.5 degC Maximum Accuracy Digital Temperature Sensor, 400 uA, 2.7 to 5.5 V, -40 to 125 degC, 8-pin DFN (MC8), Tape and Reel", Manufacturer=Microchip, ComponentLink1Description="Manufacturer URL", ComponentLink1URL=http://www.microchip.com, ComponentLink2Description=Datasheet, ComponentLink2URL=http://ww1.microchip.com/downloads/en/DeviceDoc/25095A.pdf, ComponentLink3Description="Package Specification", ComponentLink3URL=http://www.microchip.com/stellent/groups/techpub_sg/documents/packagingspec/en012702.pdf, ComponentLink4Description="Product URL", ComponentLink4URL=http://www.microchip.com/MCP9808, DatasheetVersion="Rev. A", Mounting Technology="Surface Mount", PackageDescription="8-Lead Plastic Dual Flat, 2 x 3 mm Body, 0.5 mm Pitch", PackageReference=DFN-MC8, PackageVersion=C04-123C, PartNumber=MCP9808T-E/MC
U9: library part CMP-00256-A.5, "Hosyond 5 Pcs 0.96 Inch OLED I2C Display Module 128x64 Pixel OLED Display", Amazon Link=https://www.amazon.com/dp/B09C5K91H7?ref=ppx_yo2ov_dt_b_product_details&th=1

## Free pads (board coordinates)
  round 137.79 hole 78.74: 7(7150,1695) 7(7150,3670) 7(8125,1695) 7(8125,3670)
  round 100 smd: 8(6840.6,2808.45) 8(6910,2300) 8(7105,3495) 8(8350,3385)

## Via types
v1: diameter 28, hole 15, Top Layer to Bottom Layer, tented both sides, 71 vias
v2: diameter 19.68, hole 7.87, Top Layer to Bottom Layer, 2 vias

## Nets (pads, with @x,y where several pads share a name; then routed paths per layer and width w, separated by ;. In a path a pad name is that pad's centre, name@x,y a point inside that pad or via, vN(x,y) a via of type N, cw(c..) or ccw(c..) an arc to the next point about the centre after c; other vN are vias at no path point)
1V8: C9.1 C10.1 C14.2 pad.8@6840.6,2808.45 R15.2 U5.11 U6.5 | length 636.1
  Top Layer w8: pad.8@6840.6,2808.45 pad.8@6854.53,2824.53 ; v1(6845.59,2999.65) 6845.59,2958.94 C14.2 pad.8@6849.53,2824.53 ; R15.2 6898.87,3185 6890,3176.13 6890,3090 6899.53,3080.47 v1(6925,3080.47) v1(6985,3080.47)
  Bottom Layer w8: v1(6845.59,2999.65) 6845.59,3000.35 6925,3079.76 v1(6925,3080.47) ; v1(6985,3080.47) 6985,3030.63 7017.13,2998.5 U5.11@7025,2998.5
3V3: C3.2 C4.2 C6.2 C7.2 C8.1 C11.1 C12.1 C13.2 C15.1 C16.1 C17.1 C18.1 C19.2 C20.2 D5.2 D6.1 pad.8@7105,3495 R6.1 R7.2 R9.2 R10.2 R18.2 U2.5 U2.6 U2.7 U3.1 U4.7 U5.9 U5.10 U6.1 U6.3 U7.2 U7.9 U7.10 U8.5 U8.6 U8.7 U8.8 U9.2 | length 5767.6
  Top Layer w8: U6.3 6794.41,3100.57 6799.1,3105.25 6840.9,3105.25 6845.59,3100.57 U6.1@6845.59,3089.15 ; v1(6835,2034.53) 6835.47,2035 U7.10 U7.9 U7.2 ; v1(6890,2090) v1(6935,2090) 7030,2185 7177.53,2185 7197.56,2164.97 R18.2 7285,2125 v1(7305.25,2104.75) ; v1(7025,2967.01) 7021.17,2970.83 7003.69,2970.83 C12.1 6926.5,2994.53 6923.25,2997.78 6923.25,3001.28 6918.25,3006.28 6914.75,3006.28 6849.46,3071.56 6845.59,3075.43 U6.1@6845.59,3089.15 ; U8.5 U8.6 U8.7 U8.8 ; C18.1 U8.8 ; v1(7305.25,2025.72) 7242.44,1962.91 U8.8 ; U2.5@7345.63,3455.81 U2.6 U2.7 ; U2.5@7345.63,3456.73 U2.5 7320.39,3464.61 7305.79,3450 C4.2 ; v1(7463.62,2012.72) 7507.24,2012.72 C8.1 7599.09,2104.56 7599.09,2158.22 7620.71,2179.84 7692.99,2179.84 7771.06,2101.77 U3.1 7858.86,2145.67 C7.2 C6.2@7890.47,2155 ; U9.2 7585,3314.53 C20.2 C19.2 7549.78,3374.75 7496,3374.75 7446.25,3325 7360,3325 C3.2 7265,3350 7242.56,3372.44 R6.1 7242.56,3447.56 C4.2 ; C6.2 7930.47,2190 v1(8025,2190) ; R10.2 8168.48,1845.92 8188.65,1845.92 8197.56,1854.83 v1(8197.56,1895) ; D6.1 8180,2123.31 8225,2168.31 D5.2 ; U6.1@6845.59,3089.15 6854.39,3089.15 6860.76,3095.53 6860.76,3118.76 C13.2 6849.53,3204.53 6965,3320 6965,3435 7025,3495 7105,3495 7121.72,3478.28 7212.53,3478.28 7219.82,3485.57 7219.82,3499.03 7225.78,3505 R7.2 7247.56,3452.56 C4.2
  Bottom Layer w8: v1(6835,2034.53) 6835,2034.76 6890,2089.76 v1(6890,2090) ; v1@6935,2085.84 6935,2700 7062.58,2827.58 ; v1(7025,2967.01) 7025,2935.51 7032.87,2935.51 7057.58,2910.81 7057.58,2827.58 ; v1(7305.25,2104.75) v1(7305.25,2025.72) 7448.21,2025.72 7461.22,2012.72 v1(7463.62,2012.72) ; v1(8025,2190) 8095,2190 v1(8180,2105) 8255,2030 8330,2030 8350,2010 8350,1950 8295,1895 v1(8197.56,1895)
ALERT: R18.1 U8.3 | length 49
  Top Layer w8: R18.1 7145.16,2122.28 U8.3
BUCK_IN: C5.2 D1.1 Q1.2 U2.1 U2.2 U2.3 | length 529.1
  Top Layer w8: U2.3 U2.2 U2.1 7424.37,3535.16 C5.2 7510.79,3540 7567.6,3483.19 Q1.2 7567.6,3476.5 7592.39,3451.71 7786.71,3451.71 D1.1
BUILTIN: D4.2 U3.11 | length 192.2
  Top Layer w8: D4.2 8034.06,2008.07 8050.98,2025 U3.11
DEBUG: SW5.2 U3.13 | length 1373.8
  Top Layer w8: SW5.2 8018.07,2356.93 v1(8110,2265) ; U3.13 8129.85,2076.18 8145,2091.33 8145,2173.44 8160,2188.44 v1(8160,2215)
  Bottom Layer w8: v1(8110,2265) v1(8160,2215)
EVI: R17.2 U4.8 | length 63.5
  Top Layer w8: U4.8 7463.62,2106.06 R17.2
GND: C1.1 C2.1 C4.1 C5.1 C6.1 C7.1 C8.2 C9.2 C10.2 C11.2 C12.2 C13.1 C14.1 C15.2 C16.2 C17.2 C18.2 C19.1 C20.1 J1.1 J1.2 J1.3 J1.4 J1.A1-B12 J1.B1-A12 P1.2 P2.3 P3.2 pad.7 pad.8@6910,2300 R1.1 R2.2 R3.2 R5.1 R8.2 R13.1 R16.1 R17.1 SW2.L2 SW3.1 SW4.1 SW5.1 U1.2 U2.9 U2.10 U3.14 U4.5 U5.4 U5.12 U6.2 U7.3 U7.6 U7.7 U7.8 U8.4 U8.9 U9.1 | length 237.4
  Top Layer w8: v1(6820,3050) U6.2 ; U7.3 6929.38,2000.23 6943,2013.85 6947.53,2013.85 U7.6 v1(6949.07,2035) U7.8 ; v1(7116.19,2077.41) 7116.52,2077.09 U8.4 ; U2.9 7404.69,3407.52 7415,3397.2 v1(7415,3395) 7415,3398.15 7424.37,3407.52 U2.10 ; C8.2 v1(7525,2120) ; v1(8090,2130) 8090,2102.91 U3.14
  other v1: 7125.47,1915 7525,1927.44 7463.62,1941.85 6835,1975.47 6830.94,2090 6994.06,2090 7412.44,2110 7790.47,2155 7954.53,2155 7035,2223.07 6910,2300 8309.29,2447.64 8426.93,2690 8187.44,2775 8235,2882.56 6930,2935.47 6980,2935.47 6790.47,2955 8213.66,2979.02 7122.24,3000 7027.76,3031.5 6790.47,3130 6925,3139.53 6985,3139.53 8213.66,3230.98 7145,3350 7515.47,3350 7679.53,3350 7872.44,3350 8272.56,3350 6863.07,3390 7865,3425.94 8023.95,3445 7185.94,3450 7574.88,3530 7360.47,3540 7961.42,3540
  other v2: 7155,2000.31 7155,2039.68
IND_GND: R11.1 R12.1 SW2.COM | length 1031.2
  Top Layer w8: R11.1 7792.44,1902.44 7814.7,1924.7 7914.7,1924.7 7975,1985 7975,2067.73 8191.11,2283.84 8258.57,2283.84 8309.29,2334.57 SW2.COM 8301.42,2388.58 8270.87,2419.13 8270.87,2524.13 8262.44,2532.56 R12.1
NetC3_1: C3.1 R6.2 R8.1 U2.8 | length 341
  Top Layer w8: R8.1 7150.12,3400 v1(7187.44,3400) ; U2.8 7385,3389.16 7394.06,3380.11 v1(7394.06,3350)
  Bottom Layer w8: v1(7187.44,3400) 7344.06,3400 v1(7394.06,3350)
NetD2_1: D2.1 Q1.1 R3.1 | length 119.9
  Top Layer w8: R3.1 7633.71,3526.29 7633.71,3488.53 7647.36,3474.88 D2.1
NetD3_1: D3.1 R4.1 | length 73.3
  Top Layer w8: R4.1 8072.56,3350.22 8082.34,3360 8119.06,3360 D3.1
NetD4_1: D4.1 R11.2 | length 70.5
  Top Layer w8: R11.2 7910.94,1875 D4.1
NetD5_1: D5.1 R12.2 | length 113.4
  Top Layer w8: D5.1 R12.2
NetD7_1: D7.1 R13.2 | length 206.9
  Top Layer w8: R13.2 8337.99,2775 8414.06,2851.06 D7.1
NetJ1_A5: J1.A5 R1.2 | length 366.2
  Top Layer w8: J1.A5 8251.33,3055.79 8290.22,3016.9 8290.22,2923.47 8272.76,2906 8214.22,2906 8205.32,2897.1 8205.32,2853.19 8231.06,2827.44 R1.2
NetJ1_B5: J1.B5 R5.2 | length 290.9
  Top Layer w8: J1.B5 8258.02,3173.9 8291.52,3207.4 8291.52,3293.54 8268.32,3316.74 8224.15,3316.74 8217.85,3323.04 8217.85,3349.6 R5.2
NetP3_1: P3.1 R14.1 | length 94.5
  Top Layer w8: R14.1 8212.56,1980 P3.1
NetQ1_3: Q1.3 SW1.L1 | length 1557.6
  Top Layer w8: SW1.L1 6970.71,2660.71 7010,2700 7405,2700 7845,3140 7845,3305 7739.84,3410.16 Q1.3
NetR7_1: R7.1 U2.4 | length 246.5
  Top Layer w8: R7.1 7192.44,3532.56 7199.88,3540 7310,3540 7365.31,3484.68 U2.4
NetR15_1: R15.1 U5.13 | length 222.1
  Bottom Layer w8: v1(6977.56,3185) 7050,3185 7065,3170 7065,3090 7040.88,3065.88 7030.65,3065.88 U5.13
PA4: U3.2
PA6: U3.4
PA7: U3.5
PROG: R2.1 U1.5 | length 62.1
  Top Layer w8: R2.1 7927.56,3400.78 7934.37,3407.6 U1.5
RXD: P2.2 U3.6 | length 227.1
  Top Layer w8: P2.2 7711.18,1973.82 U3.6
SCL: R9.1 U3.9 U4.3 U5.2 U7.1 U8.2 U9.3 | length 4047.1
  Top Layer w8: v1(7085,3065) 7080,3065 7056.45,3041.45 7056.45,2933.99 6867.67,2745.21 6805.21,2745.21 6780,2720 6780,1980 6809.28,1950.72 6865.22,1950.72 6890,1975.5 U7.1 6891.5,1974.5 6891.5,1968.5 6916.09,1943.91 6998.91,1943.91 7010,1955 7010,1990 7020,2000 7045,2000 7075,2030 7075,2145 7090,2160 v1(7170,2160) 7170,2108.34 7164.84,2103.18 U8.2 ; v1(7415,1890) 7415,1865 7474.44,1805.56 8125.56,1805.56 8142.44,1822.44 R9.1 8142.44,1947.06 8120.54,1968.96 8096,1968.96 U3.9
  Bottom Layer w8: v1(7085,3065) 7086.75,3063.25 U5.2@7117.74,3063.25 ; U5.2@7122.74,3063.25 7124.49,3061.5 7531.5,3061.5 U9.3 ; v1(7170,2160) 7235,2160 7254.1,2140.9 v1(7254.1,2100.33) 7254.1,2033.19 7310,1977.28 v1(7416.38,1977.28) 7415.69,1976.59 7415.69,1890.69 v1(7415,1890)
SDA: R10.1 U3.8 U4.4 U5.3 U7.4 U8.1 U9.4 | length 3645
  Top Layer w8: 6921.15,2716.15 6916.15,2716.15 ; U7.4 6949.07,1975.5 6954.57,1970 v1(6955,1970) 6975,1990 6975,2050 6965,2060 6810,2060 6800,2070 6800,2110.21 6815,2125.21 6815,2703.18 6827.97,2716.15 6916.15,2716.15 ; v1(7085,3030) 7085,2885 6916.15,2716.15 ; U8.1 7190.58,2071.03 7191.06,2071.51 7311.44,2071.51 7369.58,2013.38 7369.58,1965.42 7393.15,1941.85 U4.4 7422.28,1941.85 7428.13,1936.01 7428.13,1930.1 7478.23,1880 7740,1880 7780,1840 7884.16,1840 7884.66,1839.5 8065.34,1839.5 8065.84,1840 8102.66,1840 8112.44,1849.78 8112.44,1943.37 8107.58,1948.23 U3.8
  Bottom Layer w8: v1(6955,1970) 7057.96,1970 7146.93,2058.96 7173.93,2058.96 7186.48,2071.51 v1(7191.9,2071.51) ; v1(7085,3030) U5.3@7119.49,3030 ; U5.3@7124.49,3030 7600,3030 U9.4
SET: SW4.2 U3.12 | length 2242.7
  Top Layer w8: SW4.2 6996.93,3372.28 7044.21,3325 v1(7045,3325) ; v1(8040,2050) 8040.3,2050.3 8090.85,2050.3 U3.12
  Bottom Layer w8: v1(7045,3325) 7095,3275 7810,3275 7985,3100 7985,2105 v1(8040,2050)
STAT: R4.2 U1.1 | length 60.3
  Top Layer w8: R4.2 8017.44,3401.09 U1.1
TXD: P2.1 U3.7 | length 211.4
  Top Layer w8: P2.1 7669.99,1944.99 7855.62,1944.99 U3.7
UPDI: D6.2 R14.2 U3.10 | length 126.8
  Top Layer w8: U3.10 8096,1994.55 8123.53,1994.55 8131.35,1986.74 8150.71,1986.74 R14.2 8152.44,1988.94 8162.22,1998.72 8166.16,1998.72 8175.17,2007.73 8175.17,2025.95 D6.2
USB_VCC: C1.2 D1.2 D2.2 D3.2 D7.2 J1.A4-B9 J1.B4-A9 pad.8@8350,3385 U1.4 | length 1758.6
  Top Layer w8: D2.2 7789.8,3530 D1.2 7820.2,3529.8 C1.2 7867.6,3482.4 U1.4 7936.39,3482.74 7969.98,3482.74 7988.18,3500.94 7988.18,3553.18 7999.75,3564.75 8060.37,3564.75 8131.06,3494.06 D3.2 8240.94,3494.06 8350,3385 8205.88,3385 8193.02,3372.15 8193.02,3323.02 8175,3305 8175,3207.42 8183.71,3198.71 ; 8183.71,3011.29 8175,3020 8175,3190 8183.71,3198.71 ; J1.A4-B9 8184.3,3010.51 8175,3001.22 8175,2840 8210.34,2804.66 8284.66,2804.66 8295.94,2815.94 D7.2 ; J1.B4-A9 8212.88,3198.71 8183.71,3198.71
VBACKUP: R16.2 U4.6 | length 63.6
  Top Layer w8: U4.6 7519.72,1977.28 R16.2
VBAT: C2.2 P1.1 SW1.COM U1.3 | length 1926.5
  Top Layer w8: SW1.COM 7006.42,2506.42 7055,2555 P1.1 7445,2650 8123.2,3328.2 8162.79,3328.2 8178.29,3343.7 8178.29,3421.6 8159.89,3440 8105,3440 8062.6,3482.4 U1.3 8023.95,3536.53 C2.2
WAKE: SW3.2 U3.3 | length 889.7
  Top Layer w8: U3.3 7930.59,2050.59 8178.38,2298.38 8178.38,2623.9 8244.48,2690 SW3.2
pads on no net: J1. J1.A6 J1.A7 J1.A8 J1.B6 J1.B7 J1.B8 P?.1 P?.2 P?.3 P?.4 P?.5 P?.6 P?.7 P?.8 SW1.L2 SW1.M1 SW1.M2 SW1.M3 SW1.M4 SW1.M5 SW1.M6 SW2.L1 SW2.M1 SW2.M2 SW2.M3 SW2.M4 SW2.M5 SW2.M6 SW3. SW4. SW5. U4.1 U4.2 U5.1 U5.5 U5.6 U5.7 U5.8 U5.14 U6.4 U7.5 U7.11 U7.12

## Polygon pours and split planes (outlines as drawn)
GND on Bottom Layer "NONET_L02_P-001" (solid, pour order 0): 6750,3770 8525,3770 8525,1595 6750,1595

## Silkscreen, mask and mechanical layers (free items; w line width, h text height)
Top Overlay:
  lines w5: 6765,2870 7085,2870 7085,3215 6765,3215 6765,2870 ; 6800,1910 7050,1910 7050,2155 6800,2155 6800,1910 ; 7095,1885 7300,1885 7300,2155 7095,2155 7095,1885 ; 7360,1865 7570,1865 7570,2175 7360,2175 7360,1865
  lines w10: 7005,1795 8270,1795 ; 7005,3570 8270,3570
  text "Designed By" at 7508.79,3689.01 h25
  text "Nicholas Niles" at 7412.57,3627.01 h35
  text "3V3" at 6981,3517.5 h25
  text "LiPo" at 8181,3497.5 h25
  text "Charging" at 8181,3456.67 h25
  text "USB" at 8411,3392.5 h25
  text "VCC" at 8411,3352.5 h25
  text "SET" at 6890.01,3290 h30
  text "Heart Rate" at 6808.37,3227.5 h25
  text "DISPLAY" at 7440.06,3095.01 h60
  text "1V8" at 6901,2792.5 h25
  text "USB PWR" at 8271.69,2787.5 h25
  text "BAT ENA" at 6806.69,2716 h25
  text "ON" at 6779.17,2611 h25
  text "WAKE" at 8305.02,2590 h30
  text "IND_ENA" at 8308.78,2540.17 h25
  text "ON" at 8459.17,2446 h25
  text "3V3" at 8191.68,2416 h25
  text "TEST" at 6980.02,2385 h30
  text "GND" at 6777.35,2287.5 h25
  text "UPDI" at 8258.35,2151 h25
  text "GND" at 7721,2097.5 h25
  text "GND" at 8366,2067.5 h25
  text "RX" at 7721,2017.5 h25
  text "PROG" at 8366,1967.5 h25
  text "TX" at 7721,1917.5 h25
  text "Pedometer" at 6820.87,1872.5 h25
  text "Temperature" at 7066.3,1850.4 h25
  text "RT Clock" at 7373.36,1827.5 h25
  text "UART" at 7609.18,1812.5 h25
  text "BUILTIN" at 7895.86,1812.5 h25
  text "Smart" at 7559.19,1728 h35
  text "Watch" at 7556.28,1677.01 h35
  text "Mk. 2" at 7578.77,1634.01 h25
Bottom Overlay:
  lines w5: 6950,2870 7200,2870 7200,3165 6950,3165 6950,2870
  lines w10: 7180,2215 8090,2215 8090,2805 7180,2805 7180,2215
  text "Heart Rate" at 7191.63,3177.5 h25
  text "Designed by:" at 7799.95,2965 h30
  text "Nicholas Niles" at 7927.41,2892.51 h45
  text "https://nicholasniles.com/" at 7939.07,2846.67 h25
  text "BAT" at 7088.32,2822.5 h25
  text "BAT-" at 6989,2737.5 h25
  text "BAT+" at 6989,2637.5 h25
  text "LiPo BATTERY" at 7972.89,2488.01 h60
  text "120mAh" at 7710.47,2421 h30
Mechanical 1:
  the board outline again, w10

## Text inside footprints (layer, text, board x,y; h text height)
U7: Mechanical 13 "*" at 6905.15,1969.5 h50 r90